# Altium PCB M26_M_V1.0.1.PcbDoc
Units mil, origin at the board's own origin, x right, y up, seen from the top; angles counter-clockwise.
Board outline 1181.1 x 1377.95 mil, 2 copper layers (Top Layer, Bottom Layer); 54 components, 36 nets, 181 pads, 31 vias.
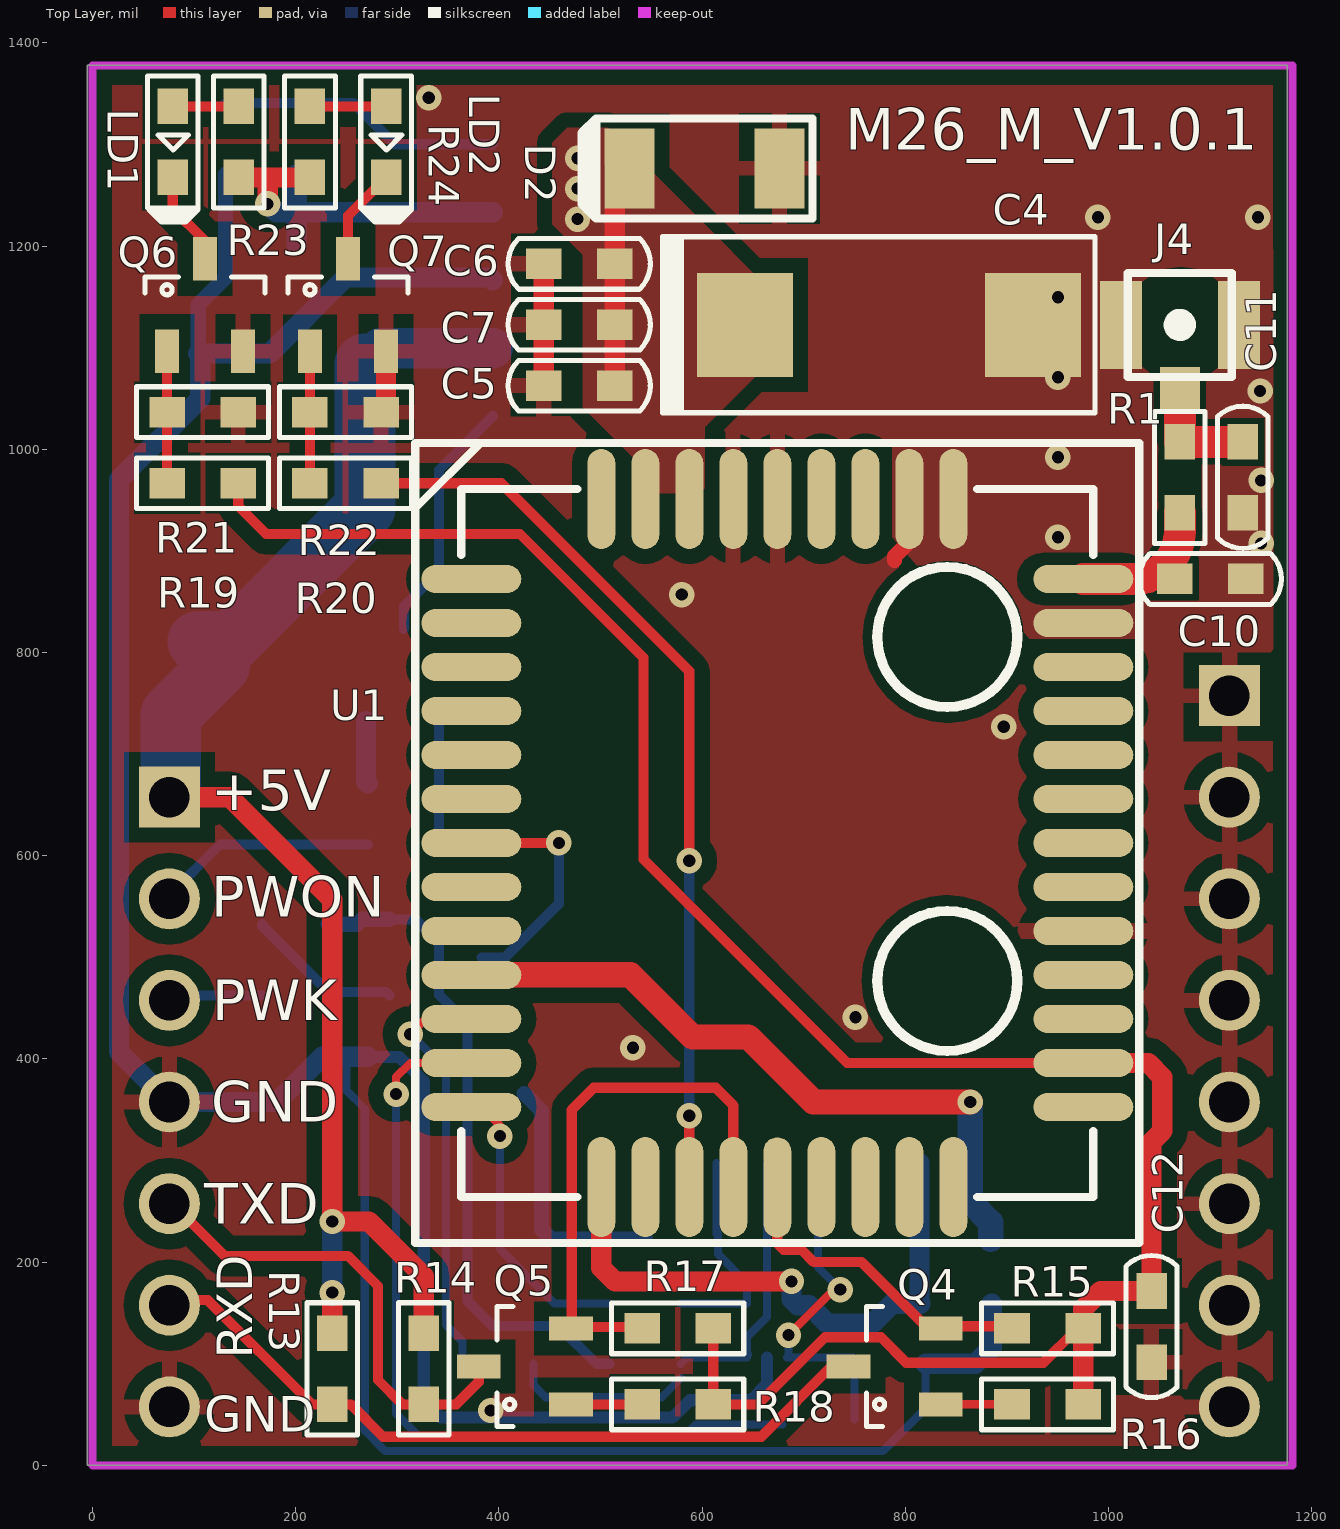
[diagram p0: Top Layer view]
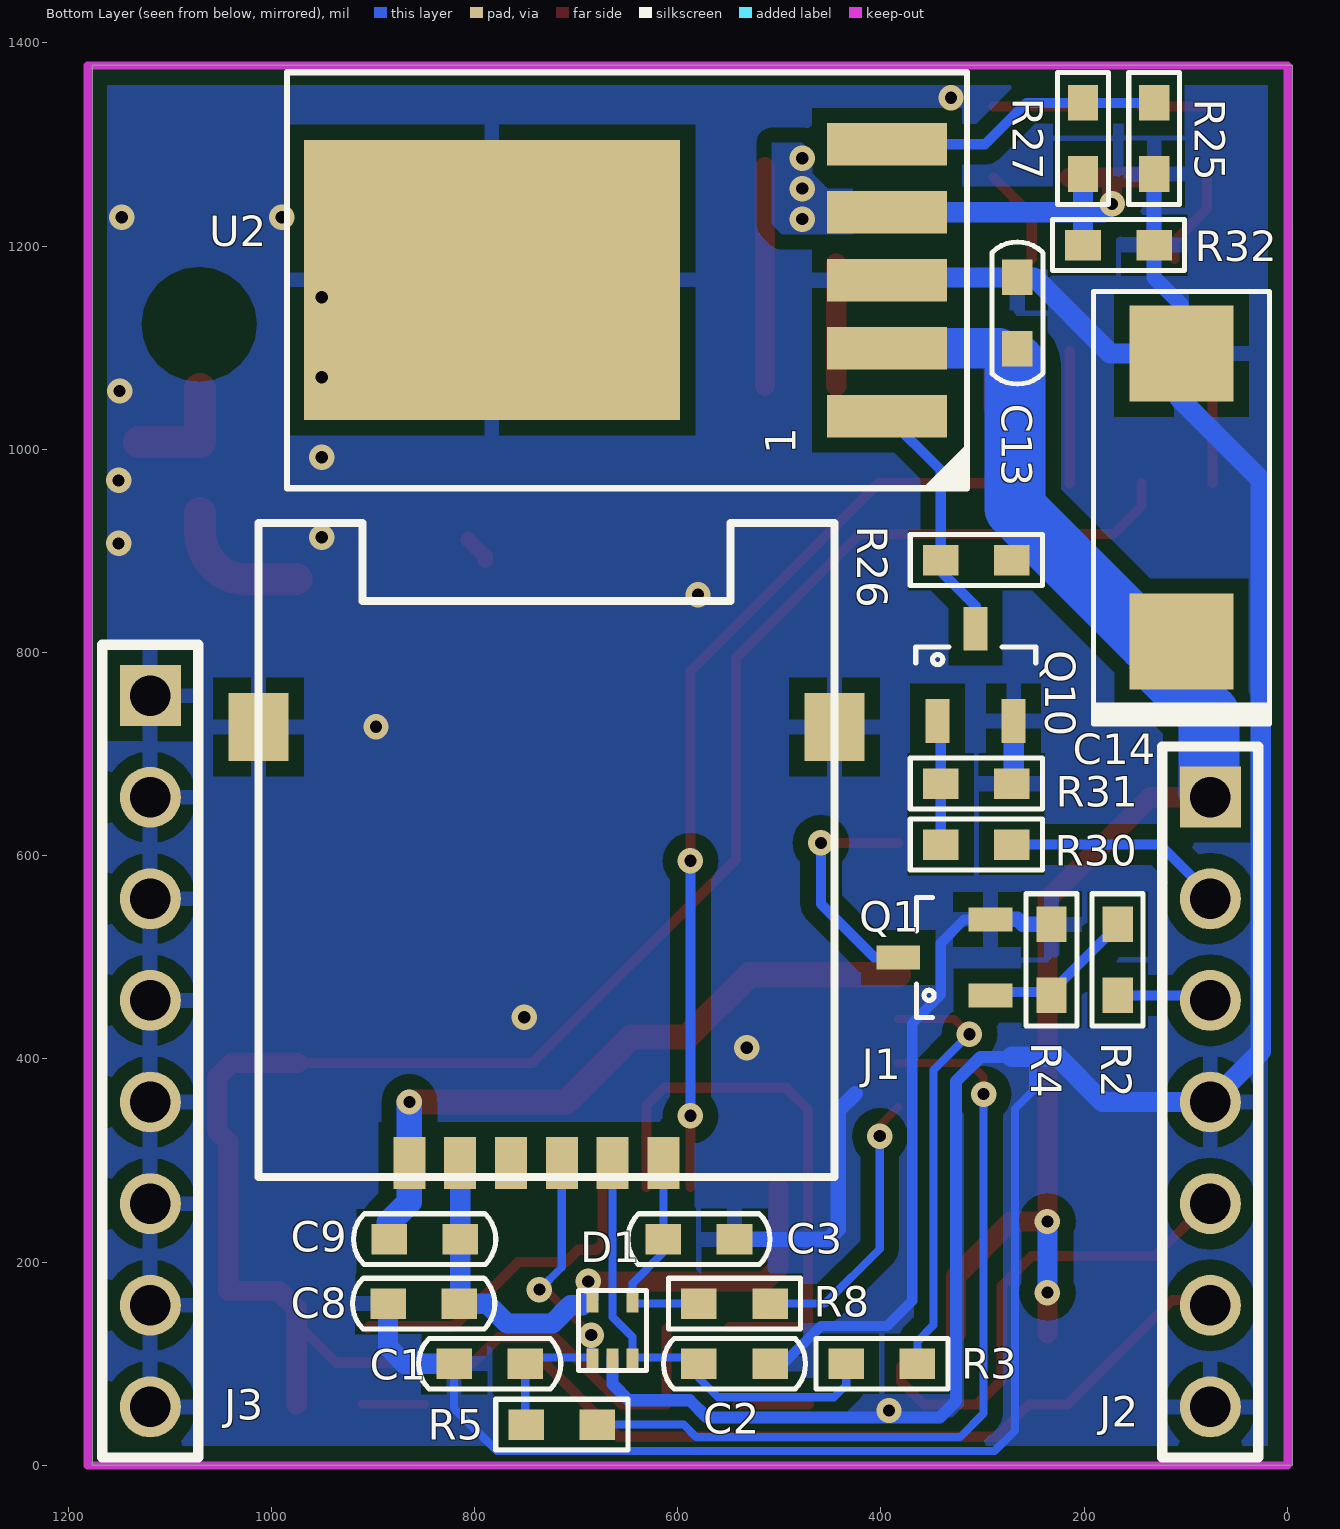
[diagram p1: Bottom Layer view, seen from below]

## Layer stack, top to bottom
Top Layer: signal copper 1.4
Dielectric: dielectric 12.6, FR-4, Dk 4.8
Bottom Layer: signal copper 1.4

## Board outline
-5,0 1176.1,0 1176.1,1377.95 -5,1377.95

## Design rules (kind name [scope] priority, off if disabled: settings)
Clearance [All] p1: gap=5.91
ComponentClearance [All] p1: gap=10 collisioncheckmode=3 verticalgap=10
PlaneClearance [All] p1: clearance=5.91
PlaneConnect [All] p1: planeconnectstyle=Relief reliefexpansion=20 reliefentries=4 reliefconductorwidth=20 reliefairgap=10
PolygonConnect [All] p1: connectstyle=Direct reliefconductorwidth=15 reliefentries=4 polygonreliefangle="90 Angle"
RoutingCorners [All] p1: cornerstyle=Round minsetback=393.7 maxsetback=393.7
RoutingVias [All] p1: holewidth=28 width=50 viastyle="Through Hole" minholewidth=12 minwidth=25 maxholewidth=50 maxwidth=50
SolderMaskExpansion [All] p1: expansion=4
TestPointUsage [All] p1: valid=0 allowmultiple=FALSE
Testpoint [All] p1: side=15 testpointundercomponent=TRUE minsize=40 maxsize=100 preferedsize=60 minholesize=0 maxholesize=40 preferedholesize=32 testpointgrid=1 style=1021 order=0123456789
Width [All] p1: maxlimit=100 minlimit=8 preferedwidth=10 minimp=50.000000 maximp=50.000000 favimp=50.000000
15 further rules are at their usual default settings.

## Components (designator, comment, footprint, x,y, rotation, side; value= is the part's Value field where it differs from the comment)
C1 "33PF" 0603_C 820.1,100 r180 bottom
C2 "33PF" 0603_C 509.1,100 r0 bottom
C3 "33PF" 0603_C 544.1,222.57 r0 bottom
C4 "470uF/16V" C_TAN_D 784.1,1122.57 r0 top
C5 "0.1uF" 0603_C 444.1,1062.57 r0 top
C6 "33P" 0603_C 444.1,1182.57 r0 top
C7 "10P" 0603_C 444.1,1122.57 r0 top
C8 "33PF" 0603_C 885.1,159.15 r180 bottom
C9 "0.1uF" 0603_C 814.1,222.57 r0 bottom
C10 "NC" 0603_C 1065.28,872.42 r0 top
C11 "NC" 0603_C 1132.28,1007.42 r270 top
C12 "4.7uF" 0603_C 1042.49,171.57 r270 top
C13 "0.1uF" 0603_C 265.68,1169.15 r270 bottom
C14 "220uF/16V" C_TAN_D 104.1,952.57 r90 bottom
D1 "ESDA6V8AV5" SOT-553 664.1,132.57 r90 bottom
D2 "BZV55C4V3" SOD-80 602.49,1276.57 r180 top
J1 "SIM_Card" MICROSIM-6 864.1,297.57 r180 bottom
J2 "CON7" SIP7 75.8,657.57 r270 bottom
J3 "CON8" SIP-8 1119.1,757.57 r270 bottom
J4 "CON2" RF-Z 1070.28,1122.42 r0 top
LD1 "WHITE" LED_0603 79.1,1337.57 r270 top
LD2 "WHITE" LED_0603 289.1,1337.57 r270 top
Q1 "2N3904" SOT23 292.1,462.57 r0 bottom
Q4 "BSS138" SOT23 835.1,60 r180 top
Q5 "BSS138" SOT23 471.1,60 r180 top
Q6 "2N3904" SOT23 73.53,1096.57 r90 top
Q7 "2N3904" SOT23 214.1,1096.57 r90 top
Q10 "2N3904" SOT23 344.1,732.57 r90 bottom
R1 "0R" 0603_R 1070.28,937.42 r90 top
R2 "4.7K" 0603_R 167.1,462.57 r90 bottom
R3 "22R" 0603_R 434.1,100 r180 bottom
R4 "47K" 0603_R 232.1,462.57 r90 bottom
R5 "22R" 0603_R 749.1,40 r180 bottom
R8 "22R" 0603_R 579.1,159.15 r180 bottom
R13 "10K" 0603_R 236.1,130 r270 top
R14 "10K" 0603_R 326.1,130 r270 top
R15 "10K" 0603_R 975.1,134.8 r180 top
R16 "10K" 0603_R 975.1,60 r180 top
R17 "10K" 0603_R 611.1,134.8 r180 top
R18 "10K" 0603_R 611.1,60 r180 top
R19 "4.7K" 0603_R 143.53,966.57 r180 top
R20 "4.7K" 0603_R 284.1,966.57 r180 top
R21 "47K" 0603_R 73.53,1036.57 r0 top
R22 "47K" 0603_R 214.1,1036.57 r0 top
R23 "1K" 0603_R 144.1,1267.57 r90 top
R24 "1K" 0603_R 214.1,1267.57 r90 top
R25 "56K" 0603_R 131.1,1341 r270 bottom
R26 "51K" 0603_R 271.1,891 r0 bottom
R27 "124K" 0603_R 201.1,1341 r270 bottom
R30 "4.7K" 0603_R 271.1,611 r0 bottom
R31 "47K" 0603_R 341.1,671 r180 bottom
R32 "750R" 0603_R 131.1,1201 r0 bottom
U1 "M26" M26 674.1,612.57 r0 top
U2 "MIC29302" TO-263-5 394.1,1032.57 r90 bottom

## Footprints (in the part's own frame and the unit in brackets; to place one, negate y for a bottom-side part, rotate by r counter-clockwise, add the part's x,y. Pads: shape width x height; smd on the part's side, far side on the other; paste and mask are expansions set on the pad)
0603_C [mil]
  rect 35x30 smd: 1(0,0) 2(70,0)
  silkscreen extent -35,-25 105,25, body extent 5,-15 65,15, height 39
0603_R [mil]
  rect 35x30 smd: 1(0,0) 2(70,0)
  silkscreen extent -30,-25 100,25, body extent 5,-15 65,15, height 39
C_TAN_D [mm]
  rect 2.4x2.6 smd: 1(-3.6,0) 2(3.6,0)
  silkscreen extent -5.67,-2.2 5.15,2.2, body extent -3.67,-2.2 3.53,2.2, height 4.3
LED_0603 [mil]
  rect 35x30 smd: A(0,0) K(70,0)
  silkscreen extent -30,-25 114,25
M26 [mm]
  oval 2.5x0.7 smd: 1(-7.65,6.6) 2(-7.65,5.5) 3(-7.65,4.4) 4(-7.65,3.3) 5(-7.65,2.2) 6(-7.65,1.1) 7(-7.65,0) 8(-7.65,-1.1) 9(-7.65,-2.2) 10(-7.65,-3.3) 11(-7.65,-4.4) 12(-7.65,-5.5) 13(-7.65,-6.6) 23(7.65,-6.6) 24(7.65,-5.5) 25(7.65,-4.4) 26(7.65,-3.3) 27(7.65,-2.2) 28(7.65,-1.1) 29(7.65,0) 30(7.65,1.1) 31(7.65,2.2) 32(7.65,3.3) 33(7.65,4.4) 34(7.65,5.5) 35(7.65,6.6)
  oval 0.7x2.5 smd: 14(-4.4,-8.6) 15(-3.3,-8.6) 16(-2.2,-8.6) 17(-1.1,-8.6) 18(0,-8.611) 19(1.1,-8.6) 20(2.2,-8.6) 21(3.3,-8.6) 22(4.4,-8.6) 36(4.4,8.6) 37(3.3,8.6) 38(2.2,8.6) 39(1.1,8.6) 40(0,8.6) 41(-1.1,8.6) 42(-2.2,8.6) 43(-3.3,8.6) 44(-4.4,8.6)
  silkscreen extent -9.05,-10 9.05,10
MICROSIM-6 [mm]
  rect 1.5x1.7 smd: 0(-3.77,10.9) 0(10.63,10.9)
  rect 0.8x1.3 smd: 1(1.27,0) 2(3.81,0) 3(6.35,0) 5(0,0) 6(2.54,0) 7(5.08,0)
  silkscreen extent -3.77,-0.35 10.63,16
RF-Z [mm]
  rect 1x1.1 smd: 1(0,-1.6)
  rect 1.05x2.2 smd: 2(-1.475,0) 2(1.475,0)
  silkscreen extent -1.3,-1.3 1.3,1.3
SIP7 [mil]
  rect 60x60 hole 40: 1(0,0)
  round 60 hole 40: 2(100,0) 3(200,0) 4(300,0) 5(400,0) 6(500,0) 7(600,0)
  silkscreen extent -50,-47 650,47
SIP-8 [mil]
  rect 60x60 hole 40: 1(0,0)
  round 60 hole 40: 2(100,0) 3(200,0) 4(300,0) 5(400,0) 6(500,0) 7(600,0) 8(700,0)
  silkscreen extent -50,-47 750,47
SOD-80 [mm]
  rect 1.25x2 smd: 1(-1.875,0) 2(1.875,0)
  silkscreen extent -2.7,-1.25 3.08,1.25
SOT23 [mm]
  rect 1.092x0.6 smd: 1(0,0) 2(0,-1.9) 3(2.308,-0.95)
  silkscreen extent 1.41,-2.45 1.85,0.55, body extent 0.45,-2.45 1.85,0.55, height 1.1
SOT-553 [mm]
  rect 0.55x0.3 smd: 1(-0.725,0.5) 2(-0.725,0) 3(-0.725,-0.5) 4(0.725,-0.5) 5(0.725,0.5)
  silkscreen extent -1,-0.85 1,0.85
TO-263-5 [mm]
  rect 1.07x3 smd: 1(0,0) 2(1.7,0) 3(3.4,0) 4(5.1,0) 5(6.8,0)
  rect 7x9.4 smd: 6(3.41,9.878)
  silkscreen extent -1.8,-2 8.6,15, body extent 0,0 6.8,12.6, height 4.5

## Part data
C1 C2 C3 C8 C9 C10 C11 C12: library part CAP, "CAP"
C4 C14: library part ECAP, "E-CAP"
C5 C6 C7 C13: library part "Cap Semi", "Capacitor"
D2: library part "DIODE SCHOTTKY"
J2: library part CON8
LD1 LD2: library part LED, "LED"
Q1 Q6 Q7 Q10: library part NPN
Q4 Q5: library part "N-Channel Enhancement MOSFET", "N-Channel Enhancement MOSFET"
R1 R13 R14 R15 R16 R17 R18: library part Res3_3, "Resistor"
R2 R4 R19 R20 R21 R22 R23 R24 R30 R31 R32: library part RES1
R3 R5 R8 R25 R26 R27: library part R0.25W, "RESISTOR"

## Via types
v1: diameter 25, hole 12, Top Layer to Bottom Layer, tented both sides, 31 vias

## Nets (pads, with @x,y where several pads share a name; then routed paths per layer and width w, separated by ;. In a path a pad name is that pad's centre, name@x,y a point inside that pad or via, vN(x,y) a via of type N, cw(c..) or ccw(c..) an arc to the next point about the centre after c; other vN are vias at no path point)
+4V: C4.1 C5.2 C6.2 C7.2 D2.2 R23.1 R24.1 R27.2 R32.2 U1.42 U1.43 U2.4 | length 606
  Top Layer w20: R23.1 R24.1 ; v1(172.49,1241.57) 172.49,1267.57 ; C5.2 D2.2@514.1,1277.57
  Bottom Layer w20: v1(172.49,1241.57) 180.7,1233.36 U2.4 ; R32.2 R27.2
  other v1: 477.49,1226.57 477.49,1256.57 477.49,1286.57
+5V: C13.2 C14.1 J2.1 R13.1 R14.1 R26.1 U2.2 | length 1465.9
  Top Layer w20: J2.1@76.11,657.57 135.1,657.57 236.1,556.57 v1(236.1,240) 272.1,240 326.1,186 R14.1 ; R13.1 v1@236.1,169.57
  Bottom Layer w20: v1(236.1,170) v1(236.1,240)
  Bottom Layer w40: C13.2@268.1,1084 283.61,1099.5 U2.2
  Bottom Layer w60: J2.1@77.1,662.57 77.1,739 125.1,787 125.1,789.84 C14.1 136.94,810.84 268.1,942 C13.2@268.1,1084
DBG_RX: U1.38
DBG_TX: U1.39
GND: C1.1 C2.1 C3.1 C4.2 C5.1 C6.1 C7.1 C8.1 C10.2 C11.2 C12.2 C13.1 C14.2 D1.2 D2.1 J1.0 J2.4 J2.7 J3.1 J3.2 J3.3 J3.4 J3.5 J3.6 J3.7 J3.8 J4.2 Q1.2 Q6.2 Q7.2 Q10.2 R4.2 R21.2 R22.2 R25.2 R31.2 R32.1 U1.27 U1.34 U1.36 U1.37 U1.40 U1.41 U2.3 U2.6 | length 4629.6
  Top Layer w15: 789.51,890.59 789.51,894.64 U1.37@806.28,911.42
  Top Layer w20: R22.2 288.91,1041.38 Q7.2 ; C5.1 C6.1
  Bottom Layer w8: 250.1,402 250.1,369 268.1,351 268.1,34 288.1,14 778,14 820.1,56.1 C1.1
  Bottom Layer w10: Q1.2 317.72,537.38 341.1,514 341.1,463 369.1,435 369.1,162 394.1,137 459.1,137 496.1,100 C2.1
  Bottom Layer w12: 271.1,402 302.1,402 326.1,378 326.1,63 342.1,47 571.1,47 588.1,64 648.1,64 664.1,80 D1.2@664.1,106
  Bottom Layer w15: R25.2 R32.1 131.1,1169 104.1,1142 C14.2 174.41,1094.31 ; R4.2 260.68,532.57 265.48,537.38 Q1.2 ; 425.1,366 442.1,349 442.1,232 451.53,222.57 C3.1
  Bottom Layer w20: C14.2 174.41,1094.31 249.25,1169.15 391.39,1169.15 U2.3 ; C14.2@106.1,1094.31 106.1,1050 26.1,970 26.1,407.27 J2.4 181.68,357.57 226.1,402 271.1,402 ; Q10.2 269.3,672.8 R31.2 ; C1.1 869.1,100 885.1,116 C8.1
  other v1: 392,54 532,411 751,441 897,727 580,857 1150.28,907.42 950.28,913.42 1150.28,969.42 950.28,992.16 1149.28,1057.42 950.28,1070.9 950.28,1149.64 989.65,1228.38 1147.13,1228.38 331,1346
M26_RXD: Q5.2 R17.2 U1.17 | length 543.4
  Top Layer w10: Q5.2@471.8,134.38 471.8,349.85 493.53,371.57 613.53,371.57 630.8,354.31 U1.17 ; Q5.2@476.65,136.15 R17.2@549.1,136.15
M26_TXD: Q4.2 R15.2 U1.18 | length 320.8
  Top Layer w10: U1.18 674.1,218.38 680.3,212.18 697.92,212.18 710.1,200 757.1,200 820.3,136.8 903.1,136.8 R15.2
NetC10_1: C10.1 R1.1 U1.35 | length 140.4
  Top Layer w31.5: U1.35 1025.73,872.42 ccw(c1025.73,915.38) 1056.1,885 ccw(c1021.87,919.24) 1070.28,919.24 R1.1
NetC11_1: C11.1 J4.1 R1.2 | length 112
  Top Layer w31.5: J4.1 R1.2 C11.1@1130.28,1007.42
NetLD1_A: LD1.A R23.2 | length 65
  Top Layer w10: LD1.A R23.2
NetLD1_K: LD1.K Q6.3 | length 93.3
  Top Layer w10: LD1.K 79.1,1236.82 110.93,1205 Q6.3
NetLD2_A: LD2.A R24.2 | length 75
  Top Layer w10: R24.2 LD2.A
NetLD2_K: LD2.K Q7.3 | length 95.7
  Top Layer w10: Q7.3 251.5,1229.98 LD2.K
NETLIGHT: R20.1 U1.16 | length 887.6
  Top Layer w10: R20.1 402.53,966.57 587.49,781.61 v1(587.49,595.03) ; U1.16 v1(587.49,343.99)
  Bottom Layer w10: v1(587.49,343.99) v1(587.49,595.03)
NetQ1_1: Q1.1 R2.2 R4.1 | length 158.3
  Bottom Layer w10: R2.2 167.1,531 R4.1@232.1,466 ; R4.1 R4.1@232.1,466 ; Q1.1 288.68,466 R4.1@232.1,466
NetQ1_3: Q1.3 U1.7 | length 234.1
  Top Layer w10: U1.7@382.92,612.57 v1(459.1,612.57)
  Bottom Layer w10: Q1.3 406.5,499.98 459.1,552.57 v1(459.1,612.57)
NetQ4_1: Q4.1 R16.2 | length 63.1
  Top Layer w8: Q4.1@848.1,60.15 R16.2@911.25,60.15
NetQ5_1: Q5.1 R18.2 | length 70
  Top Layer w10: Q5.1 R18.2
NetQ6_1: Q6.1 R19.2 R21.1 | length 130
  Top Layer w10: R19.2 Q6.1
NetQ7_1: Q7.1 R20.2 R22.1 | length 130
  Top Layer w10: R20.2 Q7.1
NetQ10_1: Q10.1 R30.2 R31.1 | length 122.8
  Bottom Layer w10: R30.2 341.1,729.57 Q10.1
NetQ10_3: Q10.3 R26.2 U2.1 | length 245.3
  Bottom Layer w10: Q10.3 306.7,845.6 341.1,880 341.1,979.57 U2.1
NetR3_2: R3.2 U1.11 | length 421.8
  Top Layer w8: v1(312.92,424.35) 327.92,439.35 U1.11@382.92,439.35
  Bottom Layer w8: v1(312.92,424.35) 348.1,389.17 348.1,138 364.1,122 R3.2
NetR5_2: R5.2 U1.12 | length 815.7
  Top Layer w8: v1(298.92,365.35) 298.92,382.04 312.92,396.04 U1.12@382.92,396.04
  Bottom Layer w8: v1(298.92,365.35) 298.92,50.91 321.92,27.91 582.01,27.91 594.1,40 R5.2
NetR8_2: R8.2 U1.13 | length 277.6
  Top Layer w8: U1.13@382.92,352.73 401.1,334.55 v1(401.1,324)
  Bottom Layer w8: v1(401.1,324) 401.1,213 454.95,159.15 R8.2
NetR25_1: R25.1 R27.1 U2.5 | length 279.9
  Bottom Layer w10: R25.1 256.78,1341 297.49,1300.29 U2.5
PWRKEY: J2.3 R2.1 | length 90
  Bottom Layer w10: J2.3@77.1,462.57 R2.1
PWRON: J2.2 R30.1 | length 214.1
  Bottom Layer w10: J2.2@77.1,562.57 125.53,611 R30.1
SIM_CLK: C3.2 D1.4 J1.3 R8.1 | length 217.2
  Bottom Layer w8: R8.1 644.42,159.15 644.42,179.15 615.68,207.89 615.68,227.57 614.1,227.57 J1.3
SIM_DATA: C2.2 D1.3 J1.7 R3.1 | length 446.8
  Bottom Layer w8: R3.1 434.1,79 446.1,67 560.42,67 C2.2@579.1,85.68 ; C2.2 585.1,106 644.42,106 644.42,126.46 664.1,146.15 J1.7
  Bottom Layer w10: D1.3@643.83,109.15 D1.3@644.42,109.15
SIM_GND: C9.2 J1.5 U1.10 | length 676.3
  Top Layer w25: U1.10@382.92,482.65 529.61,482.65 590.69,421.57 645.69,421.57 709.69,357.57 v1(864.1,357.57)
  Bottom Layer w25: v1(864.1,357.57) 864.1,259.15 884.1,239.15 C9.2
SIM_RST: C1.2 D1.1 J1.2 R5.1 | length 352.6
  Top Layer w8: v1(685.1,128.15) 729.95,173 v1(736.1,173)
  Bottom Layer w8: v1(685.1,128.15) 685.1,107.31 683.79,106 749.25,106 750.1,105.15 R5.1@750.1,45.15 ; J1.2 714.1,195 v1(736.1,173)
SIM_VDD: C8.2 C9.1 D1.5 J1.1 U1.14 | length 637.6
  Top Layer w20: U1.14 500.87,194.41 514.28,181 v1(688.1,181)
  Bottom Layer w12: v1@683.79,176.69 v1(688.1,181) ; C9.1@814.1,227.57 815.1,226.57 C8.2@815.1,170.15
  Bottom Layer w20: v1(688.1,181) 688.1,163.57 694.1,157.57 705.53,157.57 723.53,139.57 767.68,139.57 787.25,159.15 C8.2 814.1,160.15 J1.1
UART_RXD: J2.6 Q4.3 R13.2 | length 767.8
  Top Layer w10: J2.6@64.1,147.15 J2.6@64.1,162.57 ; J2.6@77.1,162.57 113.53,162.57 216.1,60 254.25,60 286.1,28.15 658.25,28.15 729.5,99.4 Q4.3@744.24,99.4
UART_TXD: J2.5 Q5.3 R14.2 | length 476.3
  Top Layer w10: J2.5@64.1,262.57 J2.5@73.68,262.57 ; J2.5@75.39,260.86 130.25,206 251.68,206 281.1,176.57 281.1,84 305.1,60 358.1,60 380.24,82.13 Q5.3
VDD_EXT: C12.1 R15.1 R16.1 R17.1 R18.1 R19.1 U1.24 | length 2170.2
  Top Layer w10: R19.1 143.53,944.15 171.1,916.57 420.91,916.57 542.49,795 542.49,596.57 743.02,396.04 U1.24@985.28,396.04 ; R17.1 R18.1 655.1,60 721.1,126 776.1,126 801.1,101 935.95,101 967.1,132.15 968.25,131 R15.1@975.1,131
  Top Layer w20: U1.24@974.1,396.04 1039.1,396.04 1053.11,382.03 1053.11,329.01 1042.49,318.39 C12.1 992.49,171.57 975.1,154.19 R15.1 ; R16.1 R15.1 ; R15.1@975.1,139.19 R15.1
pads on no net: J1.6 U1.1 U1.2 U1.3 U1.4 U1.5 U1.6 U1.8 U1.9 U1.15 U1.19 U1.20 U1.21 U1.22 U1.23 U1.25 U1.26 U1.28 U1.29 U1.30 U1.31 U1.32 U1.33 U1.44

## Polygon pours and split planes (outlines as drawn)
GND on Top Layer "Top Layer-No Net 3" (solid, remove dead copper): 1135.28,872.42 1063.28,800.42 1053.28,800.42 1159.57,800.42 1161.73,802.57 1162.28,803.13 1162.28,905.5 1135.37,905.5 1125.28,895.42
GND on Top Layer "Top Layer-No Net 2" (solid, remove dead copper): -95.72,1400.42 1199.28,1400.42 1248.28,1351.42 1248.28,1221.42 1214.28,1187.42 1213.28,1188.42 1043.28,1188.42 823.28,1188.42 807.28,1172.42 807.28,891.42 863.28,835.42 873.28,825.42 965.28,825.42 1136.28,825.42 1159.28,848.42 1170.28,859.42 1228.28,859.42 1228.28,-126.58 1230.28,-128.58 31.28,-128.58 -125.72,28.42 -125.72,1344.42 -126.72,1345.42
GND on Top Layer "Top Layer-No Net 1" (solid, remove dead copper): 963.21,1200.48 1158.58,1200.48 1162.28,1196.28 1162.28,861.8 1135.43,831.3 1119.69,813.42 922.47,813.42 858.58,885.99 827.1,885.99 811.36,885.99 788.21,912.29 787.28,913.34 787.28,1148.95 787.28,1193.12 810.43,1219.42
+4V on Top Layer "Top Layer-No Net" (solid, remove dead copper, pour order 1000): 492.49,1316.57 467.49,1316.57 452.49,1301.57 452.49,1226.57 452.49,1221.57 482.49,1191.57 482.49,1041.57 532.49,991.57 532.49,956.57 597.49,956.57 602.49,961.57 602.49,1021.57 652.49,1071.57 652.49,1171.57 607.49,1216.57 507.49,1316.57 492.49,1316.57
GND on Bottom Layer "Bottom Layer-No Net 2" (solid, remove dead copper): 998.28,1199.42 1002.28,1195.42 1149.28,1195.42 1149.28,1048.42 1119.28,1018.42 1093.28,1044.42 1008.28,1044.42 1008.28,1074.42 996.28,1086.42 998.28,1088.42 998.28,1177.42
GND on Bottom Layer "Bottom Layer-No Net 1" (solid, remove dead copper): -72.72,1451.42 1149.28,1451.42 1247.28,1353.42 1247.28,-2.58 1192.28,-57.58 9.28,-57.58 -92.72,44.42 -92.72,1421.42 -81.72,1432.42
+4V on Bottom Layer "Bottom Layer-No Net" (solid, remove dead copper, pour order 1001): 427.49,1256.57 452.49,1256.57 467.49,1271.57 467.49,1286.57 467.49,1291.57 477.49,1301.57 507.49,1301.57 507.49,1221.57 497.49,1211.57 427.49,1211.57 427.49,1221.57

## Keep-outs
Keep-Out Layer:
  lines w8: 0,0 1181.1,0 1181.1,1377.95 0,1377.95 0,0

## Silkscreen, mask and mechanical layers (free items; w line width, h text height)
Top Overlay:
  text "M26_M_V1.0.1" at 741.1,1281 h70
  text "+5V" at 117.1,645 h40
  text "PWON" at 117.1,540 h40
  text "PWK" at 118.1,438 h40
  text "GND" at 117.1,338 h40
  text "TXD" at 110.1,238 h40
  text "RXD" at 157.1,105 h35 r90
  text "GND" at 110.1,33 h35
Mechanical 1:
  lines w8: 0,0 0,1377.95 1181.1,1377.95 1181.1,0 0,0
Mechanical 15:
  lines w31.5: 1070.28,1007.42 1070.28,1062.38

## Text inside footprints (layer, text, board x,y; h text height)
U2: Bottom Overlay "1" at 483.83,995.09 h30 r270